# EAGLE board rev2 (EAGLE 7.6.0)
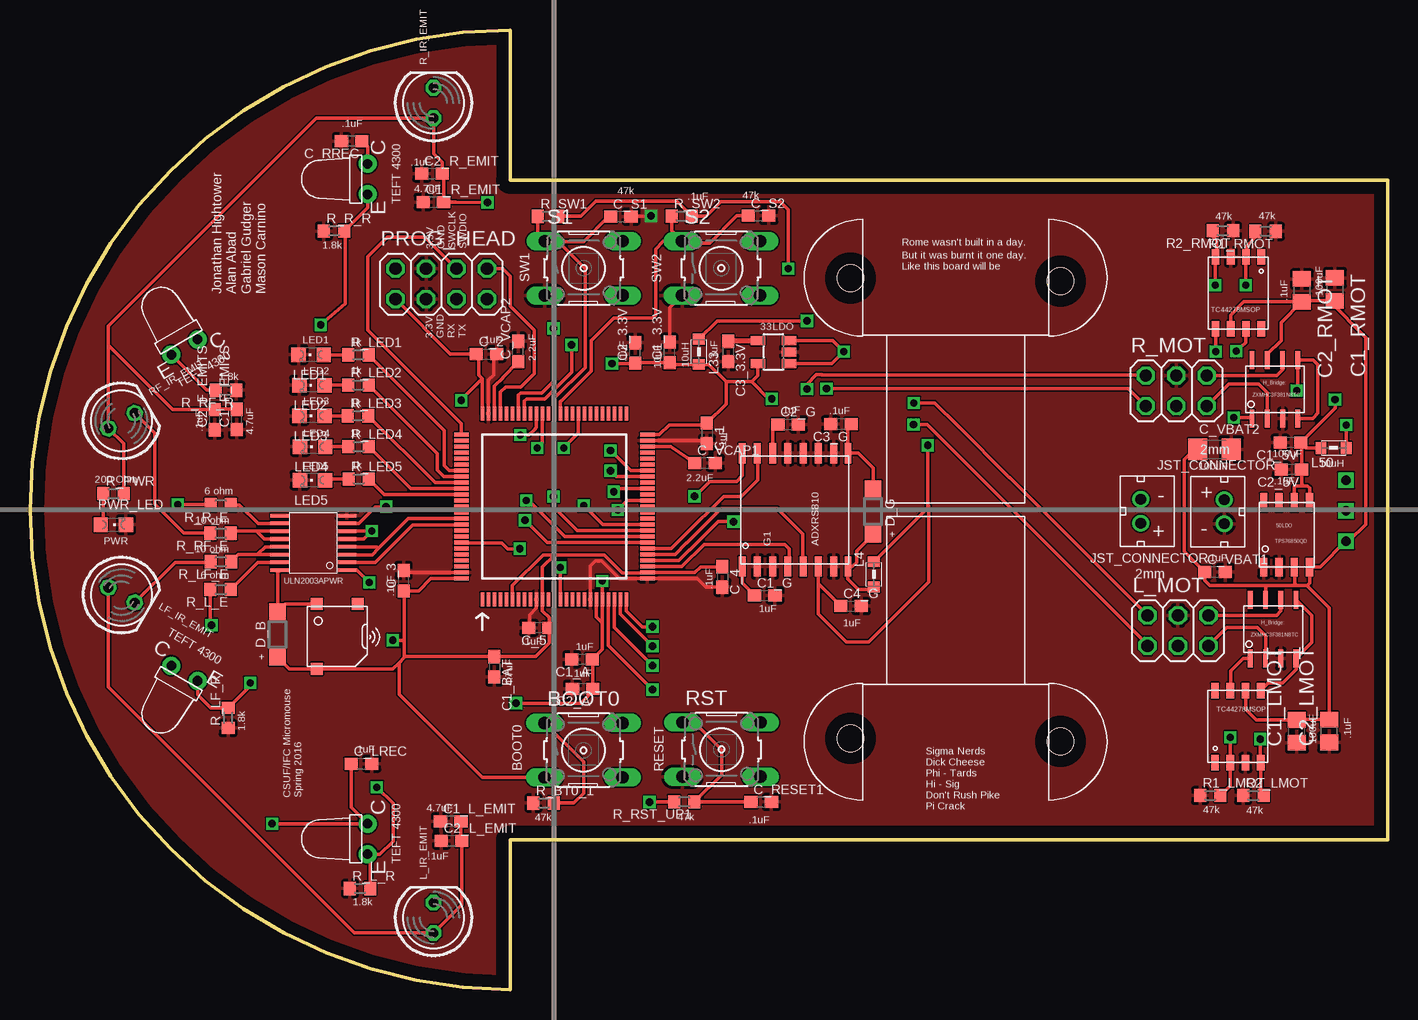
[diagram p0: board, top side]
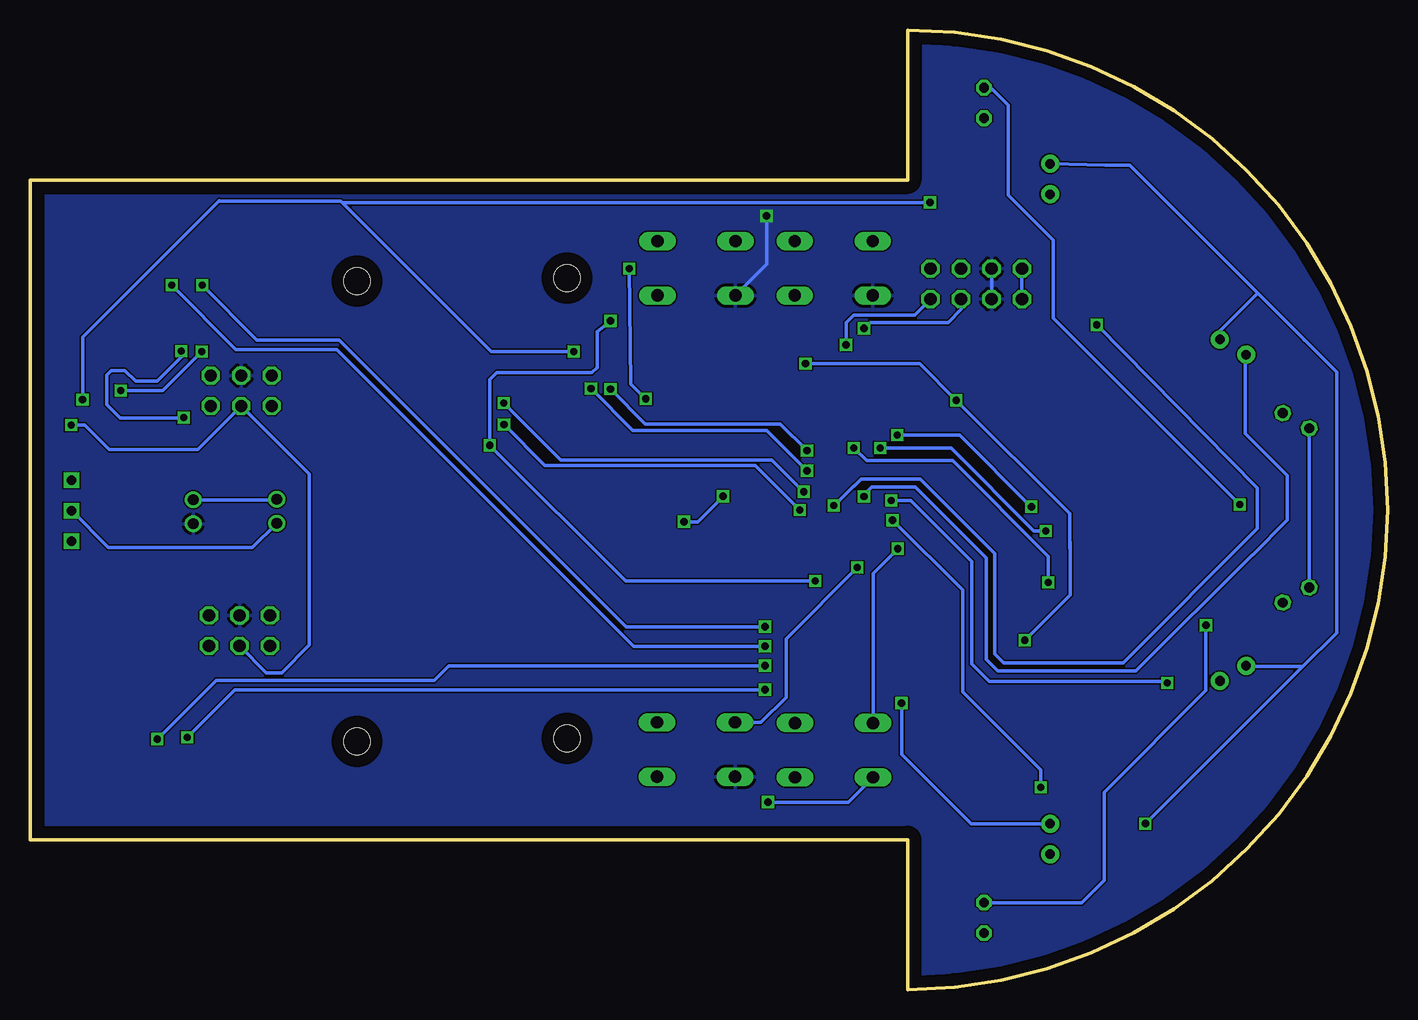
[diagram p1: board, bottom side, seen from below]

Size 113.12 x 80 mm. Coordinates in mm from the lower left corner, seen from the top.
Outline: 113.12,67.5 113.12,12.5 40,12.5 40,0 arc-180 40,80 40,67.5 113.12,67.5
Copper layers (1*16): Top 0.035mm / dielectric 1.5mm / Bottom 0.035mm
Design rules "default *": minimum track width 10mil, minimum drill 10mil, track to track 5mil, track to pad 5mil, pad to pad 5mil, via to via 5mil, smd to smd 5mil, copper to edge 40mil, drill to drill 8mil, minimum pad ring 10mil, minimum via ring 8mil, stop-mask expansion 4mil, vias tented up to drill 0mil, thermal gap 10mil

## Footprints (pad centres in the part's own frame; a part is rotated, then mirrored left to right if it is on the bottom)
SOT23-DBV = smd 0.75 x 1.2: 1 -0.95,-1.3; 2 0,-1.3; 3 0.95,-1.3; 4 0.95,1.3; 5 -0.95,1.3
8-SOIC(SMT) = smd 0.6 x 1.55: EN -0.635,-2.7; GND -1.905,-2.7; IN1 0.635,-2.7; IN2 1.905,-2.7; NC -0.635,2.7; OUT1 1.905,2.7; OUT2 0.635,2.7; PG -1.905,2.7
B3F-10XX = drill 1.016 long: 1 -3.251,2.261; 2 3.251,2.261; 3 -3.251,-2.261; 4 3.251,-2.261
C0603 = smd 1.1 x 1: 1 -0.85,0; 2 0.85,0
C0805 = smd 1.3 x 1.5: 1 -0.95,0; 2 0.95,0
C1206 = smd 1.6 x 1.8: 1 -1.4,0; 2 1.4,0
SOD123 = smd 1.4 x 1.4: A 1.9,0; C -1.9,0
SOIC-16 = smd 1.691 x 0.572: 1 -4.72,4.39; 2 -4.72,3.12; 3 -4.72,1.85; 4 -4.72,0.58; 5 -4.72,-0.69; 6 -4.72,-1.96; 7 -4.72,-3.23; 8 -4.72,-4.43; 9 4.72,-4.43; 10 4.72,-3.23; 11 4.72,-1.96; 12 4.72,-0.69; 13 4.72,0.58; 14 4.72,1.85; 15 4.72,3.12; 16 4.72,4.39
8-SOIC = smd 0.4 x 1.5: N1D/P1D -0.635,-2.45; N1G -1.905,-2.45; N2D/P2D 0.635,2.45; P1G -1.905,2.45; P1S/PS2 -0.635,2.45; P2G 1.905,2.45 | smd 0.42 x 1.5: N1S/N2S 0.635,-2.45; N2G 1.905,-2.45
WE-MI_0805 = smd 0.9 x 1: 1 -1.05,0; 2 1.05,0
LED5MM = drill 0.813 octagon: A -1.27,0; K 1.27,0
2X03 = drill 1.016 octagon: 1 -2.54,-1.27; 2 -2.54,1.27; 3 0,-1.27; 4 0,1.27; 5 2.54,-1.27; 6 2.54,1.27
RECEIVER = drill 0.8 pad 1.5: C 1.27,-0.5; E -1.27,-0.5
CHIPLED_0805 = smd 1.2 x 1.2: A 0,-1.05; C 0,1.05
TC44278MSOP = smd 0.635 x 1.27: GND 0.635,-3; IN_A -0.635,-3; IN_B 1.905,-3; NC1 -1.905,-3; OUT_A -0.635,3; OUT_B 1.905,3; VDD 0.635,3 | smd 0.66 x 1.27: NC2 -1.905,3
2X04 = drill 1.016 octagon: 1 -3.81,-1.27; 2 -3.81,1.27; 3 -1.27,-1.27; 4 -1.27,1.27; 5 1.27,-1.27; 6 1.27,1.27; 7 3.81,-1.27; 8 3.81,1.27
T212031 = drill 0.8 square: 1 0,2.54; 2 0,0; 3 0,-2.54
R0603 = smd 1 x 1.1: 1 -0.85,0; 2 0.85,0
SMT-0540-S-R = smd 1 x 1: + 1.7,-2.7; - 1.7,2.7; M -1.7,-2.7
MOTOR_MOUNT = hole 2.2: -8.75,-1.6; 8.75,-1.85
LQFP100 = smd 1.2 x 0.3: 1 -7.75,6; 2 -7.75,5.5; 3 -7.75,5; 4 -7.75,4.5; 5 -7.75,4; 6 -7.75,3.5; 7 -7.75,3; 8 -7.75,2.5; 9 -7.75,2; 10 -7.75,1.5; 11 -7.75,1; 12 -7.75,0.5; 13 -7.75,0; 14 -7.75,-0.5; 15 -7.75,-1; 16 -7.75,-1.5; 17 -7.75,-2; 18 -7.75,-2.5; 19 -7.75,-3; 20 -7.75,-3.5; 21 -7.75,-4; 22 -7.75,-4.5; 23 -7.75,-5; 24 -7.75,-5.5; 25 -7.75,-6; 51 7.75,-6; 52 7.75,-5.5; 53 7.75,-5; 54 7.75,-4.5; 55 7.75,-4; 56 7.75,-3.5; 57 7.75,-3; 58 7.75,-2.5; 59 7.75,-2; 60 7.75,-1.5; 61 7.75,-1; 62 7.75,-0.5; 63 7.75,0; 64 7.75,0.5; 65 7.75,1; 66 7.75,1.5; 67 7.75,2; 68 7.75,2.5; 69 7.75,3; 70 7.75,3.5; 71 7.75,4; 72 7.75,4.5; 73 7.75,5; 74 7.75,5.5; 75 7.75,6 | smd 0.3 x 1.2: 26 -6,-7.75; 27 -5.5,-7.75; 28 -5,-7.75; 29 -4.5,-7.75; 30 -4,-7.75; 31 -3.5,-7.75; 32 -3,-7.75; 33 -2.5,-7.75; 34 -2,-7.75; 35 -1.5,-7.75; 36 -1,-7.75; 37 -0.5,-7.75; 38 0,-7.75; 39 0.5,-7.75; 40 1,-7.75; 41 1.5,-7.75; 42 2,-7.75; 43 2.5,-7.75; 44 3,-7.75; 45 3.5,-7.75; 46 4,-7.75; 47 4.5,-7.75; 48 5,-7.75; 49 5.5,-7.75; 50 6,-7.75; 76 6,7.75; 77 5.5,7.75; 78 5,7.75; 79 4.5,7.75; 80 4,7.75; 81 3.5,7.75; 82 3,7.75; 83 2.5,7.75; 84 2,7.75; 85 1.5,7.75; 86 1,7.75; 87 0.5,7.75; 88 0,7.75; 89 -0.5,7.75; 90 -1,7.75; 91 -1.5,7.75; 92 -2,7.75; 93 -2.5,7.75; 94 -3,7.75; 95 -3.5,7.75; 96 -4,7.75; 97 -4.5,7.75; 98 -5,7.75; 99 -5.5,7.75; 100 -6,7.75
JST_CONNECTOR_FEMALE = drill 0.889: + 0,1; - 0,-1
ULN2003APWR = smd 1.55 x 0.3: 1B -2.8,2.275; 1C 2.8,2.275; 2B -2.8,1.625; 2C 2.8,1.625; 3B -2.8,0.975; 3C 2.8,0.975; 4B -2.8,0.325; 4C 2.8,0.325; 5B -2.8,-0.325; 5C 2.8,-0.325; 6B -2.8,-0.975; 6C 2.8,-0.975; 7B -2.8,-1.625; 7C 2.8,-1.625; COM 2.8,-2.275; GND -2.8,-2.275

## Placement (x,y rotation side)
33LDO  TPS73633DBVR  [SOT23-DBV]  61.96,53.16 90 top
50LDO  TPS76850QD  [8-SOIC(SMT)]  104.72,37.92 0 top
BOOT0  [B3F-10XX]  46.12,19.95 0 top
C1_3.3V  10uF  [C0603]  53.3,53.12 90 top
C1_5V  100uF  [C0603]  105.03,45.6 180 top
C1_A  1uF  [C0603]  46.01,27.53 180 top
C1_BAT  4.7uF  [C0603]  38.7,26.91 270 top
C1_F_EMITS  4.7uF  [C0603]  17.25,47.53 90 top
C1_G  1uF  [C0603]  61.22,32.85 0 top
C1_L_EMIT  4.7uF  [C0603]  35.06,14.04 0 top
C1_LMOT  100uF  [C0805]  105.57,21.53 90 top
C1_R_EMIT  4.7uF  [C0603]  33.62,65.66 0 top
C1_RMOT  100uF  [C0805]  108.74,58.38 270 top
C2_3.3V  .1uF  [C0603]  50.42,53.07 90 top
C2_5V  .1uF  [C0603]  105.11,43.35 180 top
C2_A  100nF  [C0603]  46.05,25.08 180 top
C2_F_EMITS  .1uF  [C0603]  15.4,47.51 90 top
C2_G  1uF  [C0603]  63.18,47.12 0 top
C2_L_EMIT  .1uF  [C0603]  35.13,12.41 0 top
C2_LMOT  .1uF  [C0805]  108.26,21.56 90 top
C2_R_EMIT  .1 uF  [C0603]  33.49,68.03 0 top
C2_RMOT  .1uF  [C0805]  105.99,58.29 270 top
C3_3.3V  100nF  [C0603]  58.17,53.19 270 top
C3_G  100nF  [C0603]  67.58,47.13 180 top
C4_G  1uF  [C0603]  68.42,31.98 0 top
C_1  100nF  [C0603]  56.41,46.38 270 top
C_2  100nF  [C0603]  38.05,52.98 0 top
C_3  100nF  [C0603]  31.15,34.09 90 top
C_4  100nF  [C0603]  57.69,34.4 270 top
C_5  100nF  [C0603]  42.41,30.15 180 top
C_LREC  0.1uF  [C0603]  27.63,18.83 0 top
C_RESET1  0.1 uF  [C0603]  60.94,15.63 0 top
C_RREC  0.1 uF  [C0603]  26.8,70.74 180 top
C_S1  0.1 uF  [C0603]  49.24,64.44 0 top
C_S2  0.1 uF  [C0603]  60.72,64.5 0 top
C_VBAT1  .1uF  [C0603]  98.75,34.82 0 top
C_VBAT2  100uF  [C1206]  98.7,45.04 0 top
C_VCAP1  2.2uF  [C0603]  56.25,43.91 0 top
C_VCAP2  2.2uF  [C0603]  40.68,53.2 90 top
D_B  25V  [SOD123]  20.63,29.6 90 top
D_G  >24V  [SOD123]  70.25,39.85 270 top
G1  ADXRS810  [SOIC-16]  63.73,39.99 90 top
HB_L  ZXMHC3F381N8TC  [8-SOIC]  103.59,30.05 0 top
HB_R  ZXMHC3F381N8TC  [8-SOIC]  103.75,50.05 0 top
L4  470uH  [WE-MI_0805]  70.32,34.62 270 top
L33  10uH  [WE-MI_0805]  55.74,53.17 90 top
L50  10uH  [WE-MI_0805]  108.64,45.16 0 top
L_IR_EMIT  5mm  [LED5MM]  33.62,5.98 90 top
L_MOT  [2X03]  95.67,29.92 0 top
L_REC  RECEIVER  [RECEIVER]  27.62,12.56 90 top
LED1  [CHIPLED_0805]  23.43,52.93 90 top
LED2  [CHIPLED_0805]  23.5,50.39 90 top
LED3  [CHIPLED_0805]  23.5,47.83 90 top
LED4  [CHIPLED_0805]  23.55,45.26 90 top
LED5  [CHIPLED_0805]  23.55,42.47 90 top
LF_IR_EMIT  5mm  [LED5MM]  7.62,32.89 330 top
LF_REC  RECEIVER  [RECEIVER]  12.62,25.93 150 top
MOS_L  TC44278MSOP  [TC44278MSOP]  100.66,21.92 0 top
MOS_R  TC44278MSOP  [TC44278MSOP]  100.69,58.08 180 top
PROG_HEAD  [2X04]  34.27,58.83 0 top
PWR_LED  [CHIPLED_0805]  6.95,38.76 270 top
PWR_SWITCH  T212031  [T212031]  109.67,39.92 0 top
R1_LMOT  47k  [R0603]  98.36,16.18 0 top
R1_RMOT  47k  [R0603]  102.97,63.22 180 top
R2_LMOT  47k  [R0603]  101.94,16.18 0 top
R2_RMOT  47k  [R0603]  99.41,63.26 180 top
R_BT0_1  47k  [R0603]  42.8,15.54 0 top
R_IR_EMIT  5mm  [LED5MM]  33.62,73.91 90 top
R_L_E  6 ohm  [R0603]  15.88,33.35 180 top
R_L_R  1.8k ohm  [R0603]  27.5,8.42 0 top
R_LED1  1k  [R0603]  27.37,52.91 0 top
R_LED2  1k  [R0603]  27.37,50.39 0 top
R_LED3  1k  [R0603]  27.34,47.83 0 top
R_LED4  1k  [R0603]  27.38,45.26 0 top
R_LED5  1k  [R0603]  27.4,42.56 0 top
R_LF_E  10 ohm  [R0603]  15.9,35.66 180 top
R_LF_R  1.8k ohm  [R0603]  16.51,22.65 90 top
R_MOT  [2X03]  95.53,49.92 0 top
R_PWR  200 Ohm  [R0603]  6.96,41.35 0 top
R_R_E  6 ohm  [R0603]  15.89,40.41 180 top
R_R_R  1.8k ohm  [R0603]  25.34,63.24 0 top
R_REC  RECEIVER  [RECEIVER]  27.62,67.57 90 top
R_RF_E  10 ohm  [R0603]  15.89,38.04 180 top
R_RF_R  1.8k ohm  [R0603]  16.34,49.97 180 top
R_RST_UP1  47k  [R0603]  54.52,15.66 180 top
R_SW1  47k  [R0603]  43.18,64.46 0 top
R_SW2  47k  [R0603]  54.31,64.47 0 top
RF_IR_EMIT  5mm  [LED5MM]  7.62,47.42 30 top
RF_REC  RECEIVER  [RECEIVER]  12.62,54 30 top
RST  [B3F-10XX]  57.62,20.01 0 top
S1  [B3F-10XX]  46.15,60.14 0 top
S2  [B3F-10XX]  57.59,60.14 0 top
SPK1  SMT-0540-S-R  [SMT-0540-S-R]  25.61,29.44 180 top
U$1  MOTOR  [MOTOR_MOUNT]  77.12,57.47 180 top
U$2  MOTOR  [MOTOR_MOUNT]  77.12,22.53 0 top
U$3  STM32F746VG  [LQFP100]  43.7,40.27 90 top
U$7  JST_CONNECTOR_FEMALE  [JST_CONNECTOR_FEMALE]  92.56,39.87 180 top
U$8  JST_CONNECTOR_FEMALE  [JST_CONNECTOR_FEMALE]  99.53,39.83 0 top
U$9  ULN2003APWR  [ULN2003APWR]  23.6,37.24 180 top

## Library data of the parts
33LDO = TPSRegulators; AVAILABILITY: Good; DESCRIPTION: Single Output LDO, 400mA, Adj.(1.2 to 5.5V), Cap free, Low Noise, Reverse Current Protection 5-SOT-23 -40 to 125; MF: Texas Instruments; MP: TPS73633DBVR; PACKAGE: SOT-23 Texas Instruments; PRICE: 1.34 USD
50LDO = TPSRegulators
BOOT0 RST S1 S2 = switch-omron; MPN: B3F-1000; OC_FARNELL: 176432; OC_NEWARK: 36M3542
C1_3.3V C1_5V C1_F_EMITS C1_L_EMIT C1_R_EMIT C2_3.3V C2_5V C2_F_EMITS C2_L_EMIT C2_R_EMIT C3_3.3V C_LREC C_RESET1 C_RREC C_S1 C_S2 C_VBAT1 C_VBAT2 R1_LMOT R1_RMOT R2_LMOT R2_RMOT R_BT0_1 R_L_E R_L_R R_LED1-R_LED5 R_LF_E R_LF_R R_PWR R_R_E R_R_R R_RF_E R_RF_R R_RST_UP1 R_SW1 R_SW2 = resistor
C1_A C1_BAT C1_G C1_LMOT C1_RMOT C2_A C2_G C2_LMOT C2_RMOT C3_G C4_G C_1-C_5 C_VCAP1 C_VCAP2 = rcl
D_B D_G = diode
G1 = gyroscope
HB_L HB_R = MMHbridge
L4 L33 L50 = EagleLibrary_Wuerth_Elektronik_eiSos_rev16a
L_IR_EMIT LED1-LED5 LF_IR_EMIT PWR_LED R_IR_EMIT RF_IR_EMIT = led
L_MOT PROG_HEAD R_MOT = pinhead
L_REC LF_REC R_REC RF_REC = sfh4550 & teft4300
MOS_L MOS_R = MMmosfet
PWR_SWITCH = GCswitch
SPK1 = SMT-0540-S-R; AVAILABILITY: Good; DESCRIPTION: Audio Indicator Transducer Electromagnetic 3Vp-p 100mA Solder Pad 2Vp-p 3500Hz to 4500Hz Surface Mount; MF: PUI Audio; MP: SMT-0540-S-R; PACKAGE: None; PRICE: 2.42 USD
U$1 U$2 = mounts
U$3 = MCU
U$7 U$8 = JST_CONNECTOR_FEMALE. through hole
U$9 = ULN2003APWR

## Nets
3.3V: 33LDO.5 BOOT0.3 C1_3.3V.1 C1_BAT.1 C2_3.3V.1 C_1.1 C_2.1 C_3.1 C_4.1 C_5.1 D_B.C L33.1 PROG_HEAD.1 PROG_HEAD.2 R_RST_UP1.2 R_SW1.2 R_SW2.2 SPK1.- U$3.6 U$3.11 U$3.27 U$3.50 U$3.75 U$3.100
5V: 33LDO.1 33LDO.3 50LDO.OUT1 50LDO.OUT2 C1_5V.1 C1_F_EMITS.2 C1_L_EMIT.2 C1_R_EMIT.2 C2_5V.1 C2_F_EMITS.2 C2_L_EMIT.2 C2_R_EMIT.2 L50.1 L_IR_EMIT.A LF_IR_EMIT.A R_IR_EMIT.A R_PWR.2 RF_IR_EMIT.A
A3.3V: C1_A.1 C2_A.1 C4_G.1 C_LREC.1 C_RREC.1 G1.6 L4.1 L33.2 L_REC.C LF_REC.C R_REC.C RF_REC.C U$3.20 U$3.21
A5.0V: L50.2 L_MOT.3 R_MOT.3
BOOT0: BOOT0.1 R_BT0_1.2 U$3.94
BUZZER: U$3.59 U$9.1B
G_CS: G1.4 U$3.28
G_MISO: G1.5 U$3.30
G_MOSI: G1.15 U$3.31
G_SCLK: G1.16 U$3.29
GND: 33LDO.2 50LDO.EN 50LDO.GND C1_3.3V.2 C1_5V.2 C1_A.2 C1_BAT.2 C1_F_EMITS.1 C1_G.2 C1_L_EMIT.1 C1_LMOT.1 C1_R_EMIT.1 C1_RMOT.1 C2_3.3V.2 C2_5V.2 C2_A.2 C2_F_EMITS.1 C2_G.2 C2_L_EMIT.1 C2_LMOT.1 C2_R_EMIT.1 C2_RMOT.1 C3_3.3V.2 C3_G.2 C4_G.2 C_1.2 C_2.2 C_3.2 C_4.2 C_5.2 C_LREC.2 C_RESET1.2 C_RREC.2 C_S1.2 C_S2.2 C_VBAT1.2 C_VBAT2.2 C_VCAP1.2 C_VCAP2.2 G1.2 G1.3 G1.7 G1.10 G1.11 G1.12 G1.13 HB_L.N1S/N2S HB_R.N1S/N2S L_MOT.4 LED1.C LED2.C LED3.C LED4.C LED5.C MOS_L.GND MOS_R.GND PROG_HEAD.3 PROG_HEAD.4 PWR_LED.C R1_LMOT.1 R1_RMOT.1 R2_LMOT.1 R2_RMOT.1 R_BT0_1.1 R_L_R.1 R_LF_R.1 R_MOT.4 R_R_R.1 R_RF_R.1 RST.3 S1.3 S2.3 U$3.10 U$3.19 U$3.26 U$3.49 U$3.74 U$3.99 U$8.- U$9.GND
L_EMITTER: U$3.65 U$9.5B U$9.6B
LED1: R_LED1.2 U$3.82
LED2: R_LED2.2 U$3.83
LED3: R_LED3.2 U$3.84
LED4: R_LED4.2 U$3.85
LED5: R_LED5.2 U$3.86
LEFT_REC: L_REC.E R_L_R.2 U$3.32
LENCA: L_MOT.1 U$3.39
LENCB: L_MOT.2 U$3.41
LF_EMITTER: U$3.66 U$9.7B
LF_REC: LF_REC.E R_LF_R.2 U$3.33
LPWMA: MOS_L.IN_A R1_LMOT.2 U$3.22
LPWMB: MOS_L.IN_B R2_LMOT.2 U$3.23
N$1: PWR_LED.A R_PWR.1
N$2: 33LDO.4 C3_3.3V.1
N$4: R_L_E.1 U$9.2C
N$5: HB_L.N1G MOS_L.OUT_A
N$6: HB_L.N2G HB_L.P2G MOS_L.OUT_B
N$8: HB_L.N1D/P1D L_MOT.5
N$9: U$7.- U$8.+
N$10: C1_G.1 G1.1
N$11: HB_L.N2D/P2D L_MOT.6
N$13: R_R_E.1 U$9.7C
N$14: D_G.A G1.8 L4.2
N$17: HB_R.N1G MOS_R.OUT_A
N$18: HB_R.N2G HB_R.P2G MOS_R.OUT_B
N$19: HB_R.N1D/P1D R_MOT.5
N$20: C3_G.1 D_G.C G1.9
N$21: HB_R.N2D/P2D R_MOT.6
N$23: R_RF_E.2 RF_IR_EMIT.K
N$24: R_LF_E.1 U$9.3C U$9.4C
N$25: R_IR_EMIT.K R_R_E.2
N$26: L_IR_EMIT.K R_L_E.2
N$27: R_RF_E.1 U$9.5C U$9.6C
N$28: LF_IR_EMIT.K R_LF_E.2
N$29: D_B.A SPK1.+ U$9.1C
N$31: PWR_SWITCH.2 U$7.+
N$35: C2_G.1 G1.14
N$40: LED1.A R_LED1.1
N$41: LED2.A R_LED2.1
N$42: LED3.A R_LED3.1
N$43: LED4.A R_LED4.1
N$44: LED5.A R_LED5.1
N$56: C_VCAP2.1 U$3.73
N$57: C_VCAP1.1 U$3.48
R_EMITTER: U$3.90 U$9.3B U$9.4B
RENCA: R_MOT.1 U$3.43
RENCB: R_MOT.2 U$3.44
RESET: C_RESET1.1 R_RST_UP1.1 RST.1 U$3.14
RF_EMITTER: U$3.91 U$9.2B
RF_REC: R_RF_R.2 RF_REC.E U$3.34
RIGHT_REC: R_R_R.2 R_REC.E U$3.35
RPWMA: MOS_R.IN_A R1_RMOT.2 U$3.24
RPWMB: MOS_R.IN_B R2_RMOT.2 U$3.25
RX: PROG_HEAD.5 U$3.69
SW1: C_S1.1 R_SW1.1 S1.1 U$3.63
SW2: C_S2.1 R_SW2.1 S2.1 U$3.62
SWCLK: PROG_HEAD.6 U$3.76
SWDIO: PROG_HEAD.8 U$3.72
TX: PROG_HEAD.7 U$3.68
V_BAT: 50LDO.IN1 50LDO.IN2 C1_LMOT.2 C1_RMOT.2 C2_LMOT.2 C2_RMOT.2 C_VBAT1.1 C_VBAT2.1 HB_L.P1S/PS2 HB_R.P1S/PS2 MOS_L.VDD MOS_R.VDD PWR_SWITCH.3

## Tracks (layer width: path | path; a pad name or v marks a point on that pad's centre or on a via)
3.3V  (via drill 0.6)
  Top 0.305: U$3.100 33.4,34.27 32.38,33.25 C_3.1 | C_3.1 | C_4.1 55.88,35.25 55.4,34.77 U$3.27 51.42,34.75 49.34,34.75 47.84,36.25 43.73,36.25 | U$3.75 37.7,50.93 | 37.7,50.93 37.38,51.25 37.38,52.91 C_2.1 35.04,52.98 PROG_HEAD.1 | 60.14,50.69 58,50.69 | 58,50.69 56.57,52.12 L33.1 53.46,52.12 C1_3.3V.1 50.47,52.27 C2_3.3V.1 50.39,52.19 v48.5,52.19 | U$3.50 52.46,46.27 53.25,47.06 56.25,47.06 C_1.1 58,48.81 58,50.69 | D_B.C 21.59,26.74 SPK1.- 30.24,26.74 30.75,27.25 | C_3.1 31.19,33.22 31.19,29 | 37.7,50.93 35.94,49.17 v35.94,49.12 | 30.75,27.25 30.75,24.62 37.68,17.69 BOOT0.3 | 43.73,36.25 42.75,36.25 40.2,33.7 U$3.6 | 31.19,29 31.19,27.69 | 31.19,27.69 30.75,27.25 | v30.22,29.12 31.06,29.12 31.19,29 | 31.19,27.69 31.26,27.76 C1_BAT.1 42.13,27.76 43.26,28.88 C_5.1 43.26,31.01 42.7,31.57 U$3.11 42.7,35.22 43.73,36.25 | 60.14,50.69 60.66,51.2 33LDO.5 | 60.14,50.69 61.58,49.25 v61.81,49.25 | v51.62,15.62 51.66,15.66 R_RST_UP1.2 | R_SW1.2 44.21,64.46 44.25,64.5 45.88,64.5 47.12,65.75 53.88,65.75 R_SW2.2 56.35,64.47 57.58,65.7 62.53,65.7 63.19,65.04 v63.19,60.09
  Bottom 0.305: PROG_HEAD.1 PROG_HEAD.2 | v61.81,49.25 63.06,50.5 v63.19,60.09 | v48.5,52.19 39,52.19 v35.94,49.12 26.5,39.69 26.5,37.38 | 26.5,36.78 26.5,37.38 | 26.5,37.38 26.44,37.31 26.44,32.91 v30.22,29.12 | BOOT0.3 44.94,15.62 v51.62,15.62
5V  (via drill 0.6)
  Top 0.305: 50LDO.OUT1 106.62,41.81 106.44,42 106.12,42 | 106.12,42 105.44,42 105.36,41.92 50LDO.OUT2 | C1_5V.1 105.97,45.52 C2_5V.1 105.97,42.16 106.12,42 | C1_5V.1 106.33,45.16 L50.1 | C1_5V.1 108.75,48.47 v108.75,49.19 | 33LDO.3 66.89,54.11 v67.81,53.19 66.83,52.2 33LDO.1 | v38.12,65.62 35.47,65.66 C1_R_EMIT.2 34.47,67.92 C2_R_EMIT.2 34.34,68.97 33.62,69.69 R_IR_EMIT.A 23.86,72.64 6.53,55.3 6.53,53.75 | C1_L_EMIT.2 35.91,12.48 C2_L_EMIT.2 35.98,7.07 L_IR_EMIT.A 27.04,4.71 6.5,25.25 6.5,33.5 LF_IR_EMIT.A | R_PWR.2 7.81,45.5 RF_IR_EMIT.A 6.53,53.75 | C1_F_EMITS.2 15.42,48.38 C2_F_EMITS.2 11.91,48.36 6.53,53.75
  Bottom 0.305: v108.75,49.19 108.75,54.38 97.38,65.75 | 97.38,65.75 97.37,65.75 | v67.81,53.19 74.69,53.19 87.12,65.62 | 87.12,65.62 87.25,65.75 97.38,65.75 | v38.12,65.62 87.12,65.62 | LF_IR_EMIT.A RF_IR_EMIT.A
A3.3V  (via drill 0.6)
  Top 0.305: 47.2,27.51 C1_A.1 | 47.15,27.46 C1_A.1 | 47.7,30.57 U$3.21 v47.7,34.05 v47.69,34.06 | 47.7,30.57 47.7,28.37 C1_A.1 | U$3.20 47.2,31.07 47.7,30.57 | C1_A.1 46.91,27.48 C2_A.1 47,24.98 45.89,23.88 v40.5,23.88 | 67.57,32.32 C4_G.1 65.69,33.85 | L33.2 57.28,55.75 v64.75,55.75 | v74.81,45.38 74.81,40.38 | 74.81,40.38 74.81,40.16 L4.1 | G1.6 65.69,33.85 | 65.69,33.85 65.69,31.3 68,29 69.88,29 74.88,34 74.88,40.31 74.81,40.38 | C_LREC.1 26.78,15.18 L_REC.C v20.17,13.83 | C_RREC.1 28.12,70.27 R_REC.C
  Bottom 0.305: v64.75,55.75 65.88,54.88 65.88,51.88 66.31,51.44 74.22,51.44 74.81,50.84 v74.81,45.38 63.5,34.06 v47.69,34.06 | 8.81,25.19 v20.17,13.83 | v40.5,23.88 40.5,19.62 34.7,13.83 L_REC.C | 10.81,58.06 6.92,54.17 6.92,54.15 6.9,54.15 4.25,51.5 4.25,29.75 7.06,26.94 | 10.81,58.06 21.5,68.75 23.5,68.75 R_REC.C | RF_REC.C 13.98,54.9 10.81,58.06 | 8.81,25.19 | 8.81,25.19 7.06,26.94 | LF_REC.C 11.71,26.94 7.06,26.94
A5.0V  (via drill 0.6)
  Top 0.305: L50.2 v109.69,47.06
  Bottom 0.305: L_MOT.3 93.42,26.41 92.16,26.41 89.84,28.72 89.84,42.97 R_MOT.3 99.14,45.03 106.53,45.03 108.56,47.06 v109.69,47.06
BOOT0  (via drill 0.6)
  Top 0.305: v40.81,36.75 39.81,36.75 39.31,37.25 35.97,37.25 U$3.94 | BOOT0.1 46.12,18.96 46.12,16.38 45.29,15.54 R_BT0_1.2
  Bottom 0.305: v40.81,36.75 42.87,34.69 BOOT0.1
BUZZER  (via drill 0.6)
  Top 0.305: U$9.1B 27.23,34.96 28.25,33.94 v28.28,33.94 | U$3.59 45.7,46.38 45.2,45.89 45.2,45.88 v44.47,45.16
  Bottom 0.305: v28.28,33.94 28.28,36.12 36.25,44.09 43.41,44.09 v44.47,45.16
G_CS
  Top 0.305: U$3.28 54.33,35.27 56.19,37.12 62.88,37.12 63.25,36.75 63.25,35.37 G1.4
G_MISO
  Top 0.305: U$3.30 53.76,36.27 54.7,37.22 54.72,37.22 57.59,40.09 62.28,40.09 64.38,38 64.38,35.32 G1.5
G_MOSI
  Top 0.305: U$3.31 53.45,36.77 54.45,37.77 54.46,37.77 57.81,41.12 59.25,41.12 60.62,42.5 G1.15
G_SCLK  (via drill 0.6)
  Top 0.305: U$3.29 54.08,35.77 54.95,36.65 54.96,36.65 57.34,39.03 58.59,39.03 v58.62,39 | v55.38,41.12 56.62,42.38 58.88,42.38 59.34,42.84 G1.16
  Bottom 0.305: v58.62,39 57.5,39 v55.38,41.12
GND  (via drill 0.6)
  Top 0.305: 31.34,34.75 C_3.2 31.31,34.77 U$3.99 | U$3.10 42.2,31.82 41.62,31.25 41.62,30.22 C_5.2 | U$3.74 38.2,50.82 38.62,51.25 38.62,52.71 C_2.2 | C_1.2 56.17,45.77 U$3.49 | U$3.19 46.7,35.32 47.09,35.72 47.66,35.72 49.1,34.27 U$3.26 55.6,34.27 56.33,33.55 C_4.2 | S2.3 53.3,56.84 C1_3.3V.2 | C_S1.2 50.15,64.5 v51.75,64.5
  Bottom 0.305: PROG_HEAD.3 PROG_HEAD.4 | S2.3 51.75,60.46 v51.75,64.5
  pour Bottom: 113.12,12.5 40,12.5 40,0 -2.88,0 -2.88,80 40,80 40,67.5 113.12,67.5
  pour Top: 113.12,12.25 40,12.25 40,-0.25 -2.88,-0.25 -2.88,79.75 40,79.75 40,67.25 113.12,67.25
L_EMITTER  (via drill 0.6)
  Top 0.305: U$9.6B v28.47,38.22 27.81,37.56 U$9.5B | U$3.65 42.7,45.57 v42.28,45.16
  Bottom 0.305: v42.28,45.16 36.38,45.16 29.47,38.25 28.5,38.25 v28.47,38.22
LED1
  Top 0.305: R_LED1.2 34.5,46.62 34.5,43.69 34.92,43.27 U$3.82
LED2
  Top 0.305: R_LED2.2 33.94,44.67 33.94,43.31 34.48,42.77 U$3.83
LED3
  Top 0.305: R_LED3.2 33.76,42.27 U$3.84
LED4
  Top 0.305: R_LED4.2 31.73,41.77 U$3.85
LED5
  Top 0.305: R_LED5.2 29.53,41.27 U$3.86
LEFT_REC  (via drill 0.6)
  Top 0.305: U$3.32 43.1,37.27 v41.25,39.12 | v28.9,16.86 v28.91,16.87 30.25,15.52 30.25,12.38 29.16,11.29 L_REC.E 28.35,11.07 R_L_R.2
  Bottom 0.305: v41.25,39.12 41.22,39.12 35.41,33.31 35.41,24.81 28.91,18.31 v28.91,16.87
LENCA  (via drill 0.6)
  Top 0.305: U$3.39 49.77,40.77 v48.97,39.97 | v73.62,47.09 74.78,47.09 93.12,28.75 L_MOT.1
  Bottom 0.305: v73.62,47.09 70.22,43.69 52.69,43.69 v48.97,39.97
LENCB  (via drill 0.6)
  Top 0.305: U$3.41 48.93,41.77 v48.66,41.5 | L_MOT.2 81.62,42.69 77.3,47.01 75.4,48.91 v73.66,48.91
  Bottom 0.305: v73.66,48.91 68.91,44.16 51.31,44.16 v48.66,41.5
LF_EMITTER  (via drill 0.6)
  Top 0.305: v40.84,46.22 41.56,46.22 42.09,46.75 42.09,46.76 42.19,46.85 U$3.66 | U$9.7B 27.39,38.86 28.77,40.25 v29.67,40.25
  Bottom 0.305: v40.84,46.22 35.66,46.22 v29.67,40.25
LF_REC  (via drill 0.6)
  Top 0.305: U$3.33 44.57,37.77 41.56,40.78 v41.34,40.78 | v18.34,25.56 18.34,25.33 R_LF_R.2 15.04,23.49 13.98,24.56 LF_REC.E | LF_REC.E
  Bottom 0.305: v41.34,40.78 39.75,40.78 34.66,35.69 34.66,27.16 33.19,25.69 18.47,25.69 v18.34,25.56
LPWMA  (via drill 0.6)
  Top 0.305: U$3.22 48.2,28.68 v51.88,25 | R1_LMOT.2 100.02,16.99 MOS_L.IN_A 100.03,18.93 v100.03,21.03
  Bottom 0.305: v51.88,25 96.06,25 v100.03,21.03
LPWMB  (via drill 0.6)
  Top 0.305: U$3.23 48.7,30.18 v51.88,27 51.75,27 | v102.53,20.88 102.53,18.95 MOS_L.IN_B 102.56,16.41 R2_LMOT.2
  Bottom 0.305: v51.88,27 78.22,27 79.44,25.78 97.62,25.78 v102.53,20.88
N$1
  Top 0.305: R_PWR.1 6.11,38.97 PWR_LED.A
N$2
  Top 0.406: C3_3.3V.1 58.62,54.04 58.62,54.12 60.66,54.12 33LDO.4
N$4
  Top 0.305: R_L_E.1 18.99,35.61 U$9.2C
N$5
  Top 0.305: MOS_L.OUT_A 100.06,24.96 100.06,26.56 101.1,27.6 HB_L.N1G
N$6
  Top 0.305: MOS_L.OUT_B 103.2,25.56 104.38,25.56 105.5,26.69 HB_L.N2G 106.83,28.93 106.83,31.17 HB_L.P2G 105.56,32.56
N$8
  Top 0.305: L_MOT.5 99.74,30.19 102.25,30.19 102.96,29.48 HB_L.N1D/P1D
N$9
  Bottom 0.305: U$8.+ 92.61,40.83 U$7.-
N$10
  Top 0.305: G1.1 59.34,33.88 C1_G.1
N$11
  Top 0.305: L_MOT.6 103.88,31.19 104.23,31.54 HB_L.N2D/P2D
N$13
  Top 0.305: R_R_E.1 17.45,40.41 19,38.86 U$9.7C
N$14
  Top 0.305: L4.2 70.13,33.38 69,33.38 68.17,34.21 G1.8 68.52,35.27 68.88,35.62 68.88,36.58 D_G.A
N$17  (via drill 0.6)
  Top 0.305: MOS_R.OUT_A 101.33,53.92 v100.53,53.23 | v100.31,47.69 101.75,47.69 HB_R.N1G
  Bottom 0.305: v100.53,53.23 100.53,52.72 102.53,50.72 104.31,50.72 105.22,51.62 106.38,51.62 106.75,51.25 106.75,48.78 105.62,47.66 100.34,47.66 v100.31,47.69
N$18  (via drill 0.6)
  Top 0.305: HB_R.N2G 105.67,47.62 106.88,47.62 107.31,48.06 107.31,52.12 106.94,52.5 HB_R.P2G 105.65,50.02 v105.56,49.94 | v98.81,53.19 98.81,55.06 MOS_R.OUT_B
  Bottom 0.305: v105.56,49.94 102.06,49.94 v98.81,53.19
N$19
  Top 0.305: R_MOT.5 99.92,50.5 102.38,50.5 103.11,49.77 HB_R.N1D/P1D
N$20
  Top 0.305: C3_G.1 68.17,46.87 G1.9 69.04,44.71 70.25,43.5 D_G.C
N$21
  Top 0.305: R_MOT.6 103.9,51.19 103.94,51.24 104.38,51.68 HB_R.N2D/P2D
N$23
  Top 0.305: R_RF_E.2 15.01,38.06 12.81,38.06 10.38,40.5 10.38,46.41 RF_IR_EMIT.K
N$24
  Top 0.305: R_LF_E.1 17.35,36.26 19.03,36.26 | 19.03,36.26 U$9.3C | U$9.4C 19.59,36.91 19.03,36.34 19.03,36.26
N$25  (via drill 0.6)
  Top 0.305: R_R_E.2 15.02,40.44 v12.31,40.44
  Bottom 0.305: v12.31,40.44 27.88,56 27.88,62.5 31.62,66.25 31.62,73.75 33.05,75.18 R_IR_EMIT.K
N$26  (via drill 0.6)
  Top 0.305: v15.12,30.38 15.03,30.47 R_L_E.2
  Bottom 0.305: v15.12,30.38 v15.13,30.37 15.13,24.93 23.62,16.44 23.62,9.12 25.5,7.25 L_IR_EMIT.K
N$27
  Top 0.305: R_RF_E.1 16.91,38.21 19.03,38.21 | 19.03,38.21 U$9.6C | U$9.5C 19.53,37.56 19.03,38.06 19.03,38.21
N$28
  Top 0.305: R_LF_E.2 15.02,35.62 12.09,35.62 LF_IR_EMIT.K
N$29
  Top 0.305: SPK1.+ 21.26,32.14 D_B.A 20.63,34.78 U$9.1C
N$31
  Bottom 0.305: U$7.+ 94.59,36.86 106.6,36.86 PWR_SWITCH.2
N$35
  Top 0.305: C2_G.1 61.89,46.68 G1.14
N$40
  Top 0.305: LED1.A 24.5,52.91 R_LED1.1
N$41
  Top 0.305: LED2.A R_LED2.1
N$42
  Top 0.305: LED3.A R_LED3.1
N$43
  Top 0.305: LED4.A R_LED4.1
N$44
  Top 0.305: LED5.A 24.68,42.56 R_LED5.1
N$56
  Top 0.305: U$3.73 38.7,50.32 39.38,51 39.38,51.04 C_VCAP2.1
N$57
  Top 0.305: C_VCAP1.1 53.41,45.27 U$3.48
R_EMITTER
  Top 0.305: U$9.3B 28.5,36.25 29.03,36.78 | 29.03,36.78 31.52,39.27 U$3.90 | U$9.4B 28.9,36.91 29.03,36.78
RENCA  (via drill 0.6)
  Top 0.305: U$3.43 48.85,42.77 v48.38,43.25 | v66.38,50.09 91.54,50.09 R_MOT.1
  Bottom 0.305: v66.38,50.09 62.91,46.62 51.75,46.62 v48.38,43.25
RENCB  (via drill 0.6)
  Top 0.305: U$3.44 50.04,43.27 v48.38,44.94 | R_MOT.2 92.92,51.25 65.97,51.25 65.53,51.25 64.75,50.47 v64.75,50.06
  Bottom 0.305: v64.75,50.06 61.84,47.16 50.59,47.16 v48.38,44.94
RESET  (via drill 0.6)
  Top 0.305: U$3.14 v44.19,35.19 | R_RST_UP1.1 57.62,17.91 57.62,20 55.35,22.27 RST.1 | R_RST_UP1.1 55.34,15.62 | C_RESET1.1 60.06,15.66 R_RST_UP1.1
  Bottom 0.305: v44.19,35.19 50.12,29.25 50.12,24.38 52.23,22.27 RST.1
RF_EMITTER
  Top 0.305: U$3.91 35.92,38.75 31.91,38.75 28.75,35.59 28.73,35.61 U$9.2B
RF_REC  (via drill 0.6)
  Top 0.305: U$3.34 45.6,38.27 43.62,40.25 v43.62,41.09 | RF_REC.E 14.74,49.97 R_RF_R.2
  Bottom 0.305: v43.62,41.09 43.62,41.34 43.53,41.34 42.97,41.91 39.38,41.91 33.44,35.97 33.44,27.53 32.47,26.56 20.97,26.56 11.28,36.25 11.25,36.25 8.34,39.16 8.34,42.84 11.88,46.38 11.88,52.83 RF_REC.E
RIGHT_REC  (via drill 0.6)
  Top 0.305: U$3.35 47.73,38.77 v46.16,40.34 | v24.22,55.42 26.25,57.2 26.25,63.19 R_R_R.2 28.12,65.17 R_REC.E
  Bottom 0.305: v46.16,40.34 46.09,40.34 44.47,41.97 44.44,41.97 43.84,42.56 38.94,42.56 32.75,36.38 32.75,28 32,27.25 22.03,27.25 10.84,38.44 10.84,41.79 v24.22,55.42
RPWMA  (via drill 0.6)
  Top 0.305: U$3.24 49.2,31.3 v51.88,28.62 | R1_RMOT.2 102.11,62.74 101.38,62 101.38,61.12 MOS_R.IN_A 101.31,61.06 v101.31,58.72
  Bottom 0.305: v101.31,58.72 95.97,53.38 87.56,53.38 62.81,28.62 v51.88,28.62
RPWMB  (via drill 0.6)
  Top 0.305: U$3.25 49.7,31.55 51,30.25 v51.88,30.25 | R2_RMOT.2 98.56,62.76 98.88,62.44 98.88,61.17 MOS_R.IN_B v98.78,58.72
  Bottom 0.305: v51.88,30.25 63.44,30.25 87.34,54.16 94.22,54.16 v98.78,58.72
RX  (via drill 0.6)
  Top 0.305: U$3.69 40.7,49.57 40.88,49.75 42.62,49.75 43.62,50.75 v43.62,55.12
  Bottom 0.305: PROG_HEAD.5 35.54,56.71 36.62,55.62 43.12,55.62 v43.62,55.12
SW1
  Top 0.305: U$3.63 43.69,49.31 46.25,51.88 46.25,60.12 43.98,62.4 S1.1 | R_SW1.1 42.33,62.96 S1.1 | C_S1.1 48.2,64.44 46.12,62.38 42.91,62.38 S1.1
SW2
  Top 0.305: U$3.62 44.19,49.01 44.25,49.06 46.75,51.56 46.75,54.12 48.62,56 51.88,56 52.12,56.25 52.12,61.75 52.77,62.4 S2.1 | R_SW2.1 53.46,63.27 S2.1 | C_S2.1 58.88,64.5 56.62,62.25 54.48,62.25 S2.1
SWCLK
  Top 0.305: U$3.76 35.95,47.18 28.12,55 28.12,61.12 29.75,62.75 32.89,62.75 PROG_HEAD.6
SWDIO
  Top 0.305: U$3.72 39.2,49.82 39.62,50.25 40.88,50.25 42,51.38 42,55 40,57 40,59.5 39.4,60.1 PROG_HEAD.8
TX  (via drill 0.6)
  Top 0.305: U$3.68 41.2,49.07 41.38,49.25 42.88,49.25 45.12,51.5 v45.12,53.75
  Bottom 0.305: PROG_HEAD.7 39.39,56.25 44.5,56.25 45.12,55.62 v45.12,53.75
V_BAT
  Top 0.305: 50LDO.IN1 105.38,35.2 105.38,33.88 105.56,33.69 | 105.56,33.69 106.38,33.69 | 106.38,33.69 106.44,33.69 106.63,33.88 50LDO.IN2 107.5,35.22 PWR_SWITCH.3 109.91,37.38 111.31,38.78 111.31,54.37 108.25,57.43 | C2_RMOT.2 106.08,57.43 108.25,57.43 | 108.25,57.43 C1_RMOT.2 | C2_RMOT.2 104.25,55.6 104.25,54.12 103.11,52.98 HB_R.P1S/PS2 | C_VBAT2.1 97.04,45.04 96.19,44.19 96.19,36.53 C_VBAT1.1 97.89,34.1 98.31,33.69 102.99,33.69 | MOS_L.VDD 101.31,24.9 101.31,23.38 102.2,22.48 C1_LMOT.2 105.6,22.51 C2_LMOT.2 108.26,31.8 106.38,33.69 | MOS_R.VDD 100.06,56.25 101.16,57.34 C2_RMOT.2 | 102.99,33.69 105.56,33.69 | HB_L.P1S/PS2 102.96,33.66 102.99,33.69

## Text on the board
tPlace: .1uF | .1uF | 4.7uF | 47k | .1uF | 47k | 47k | 47k | 1.8k | 3.3V / GND / SWCLK / SWDIO | Rome wasn't built in a day. | But it was burnt it one day. / Like this board will be | SW1 | SW2 | Jonathan Hightower / Alan Abad / Gabriel Gudger / Mason Carnino | 100uF | .1uF | LED1 | 1k | 3.3V / GND / RX / TX | .1uF | 10uF | 10uH | 1k | 2.2uF | .1uF | .1uF | 1.8k | LED2 | LED3 | 1k | .1uF | 4.7uF | 1uF | .1uF | 1k | .1uF | LED4 | 1k | 100uF | 100uF | 10uH | LED5 | 2.2uF | 200 Ohm | 6 ohm | .1uF | 10 ohm | + | PWR | 10 ohm | .1uF | 6 ohm | .1uF | .1uF | 1uF | 1uF | .1uF | 4.7uF | 1uF | + | .1uF | 1.8k | .1uF | .1uF | 100uF | BOOT0 | RESET | CSUF/IFC Micromouse / Spring 2016 | 4.7uF | Sigma Nerds / Dick Cheese / Phi - Tards / Hi - Sig / Don't Rush Pike / Pi Crack | 47k | 47k | 47k | 47k | .1uF | .1uF | 1.8k